# Altium PCB FrontPanel.PcbDoc
Units mm, origin at the board's own origin, x right, y up, seen from the top; angles counter-clockwise.
Board outline 35 x 35 mm, 2 copper layers (Top Layer, Bottom Layer); 33 components, 32 nets, 102 pads, 60 vias.
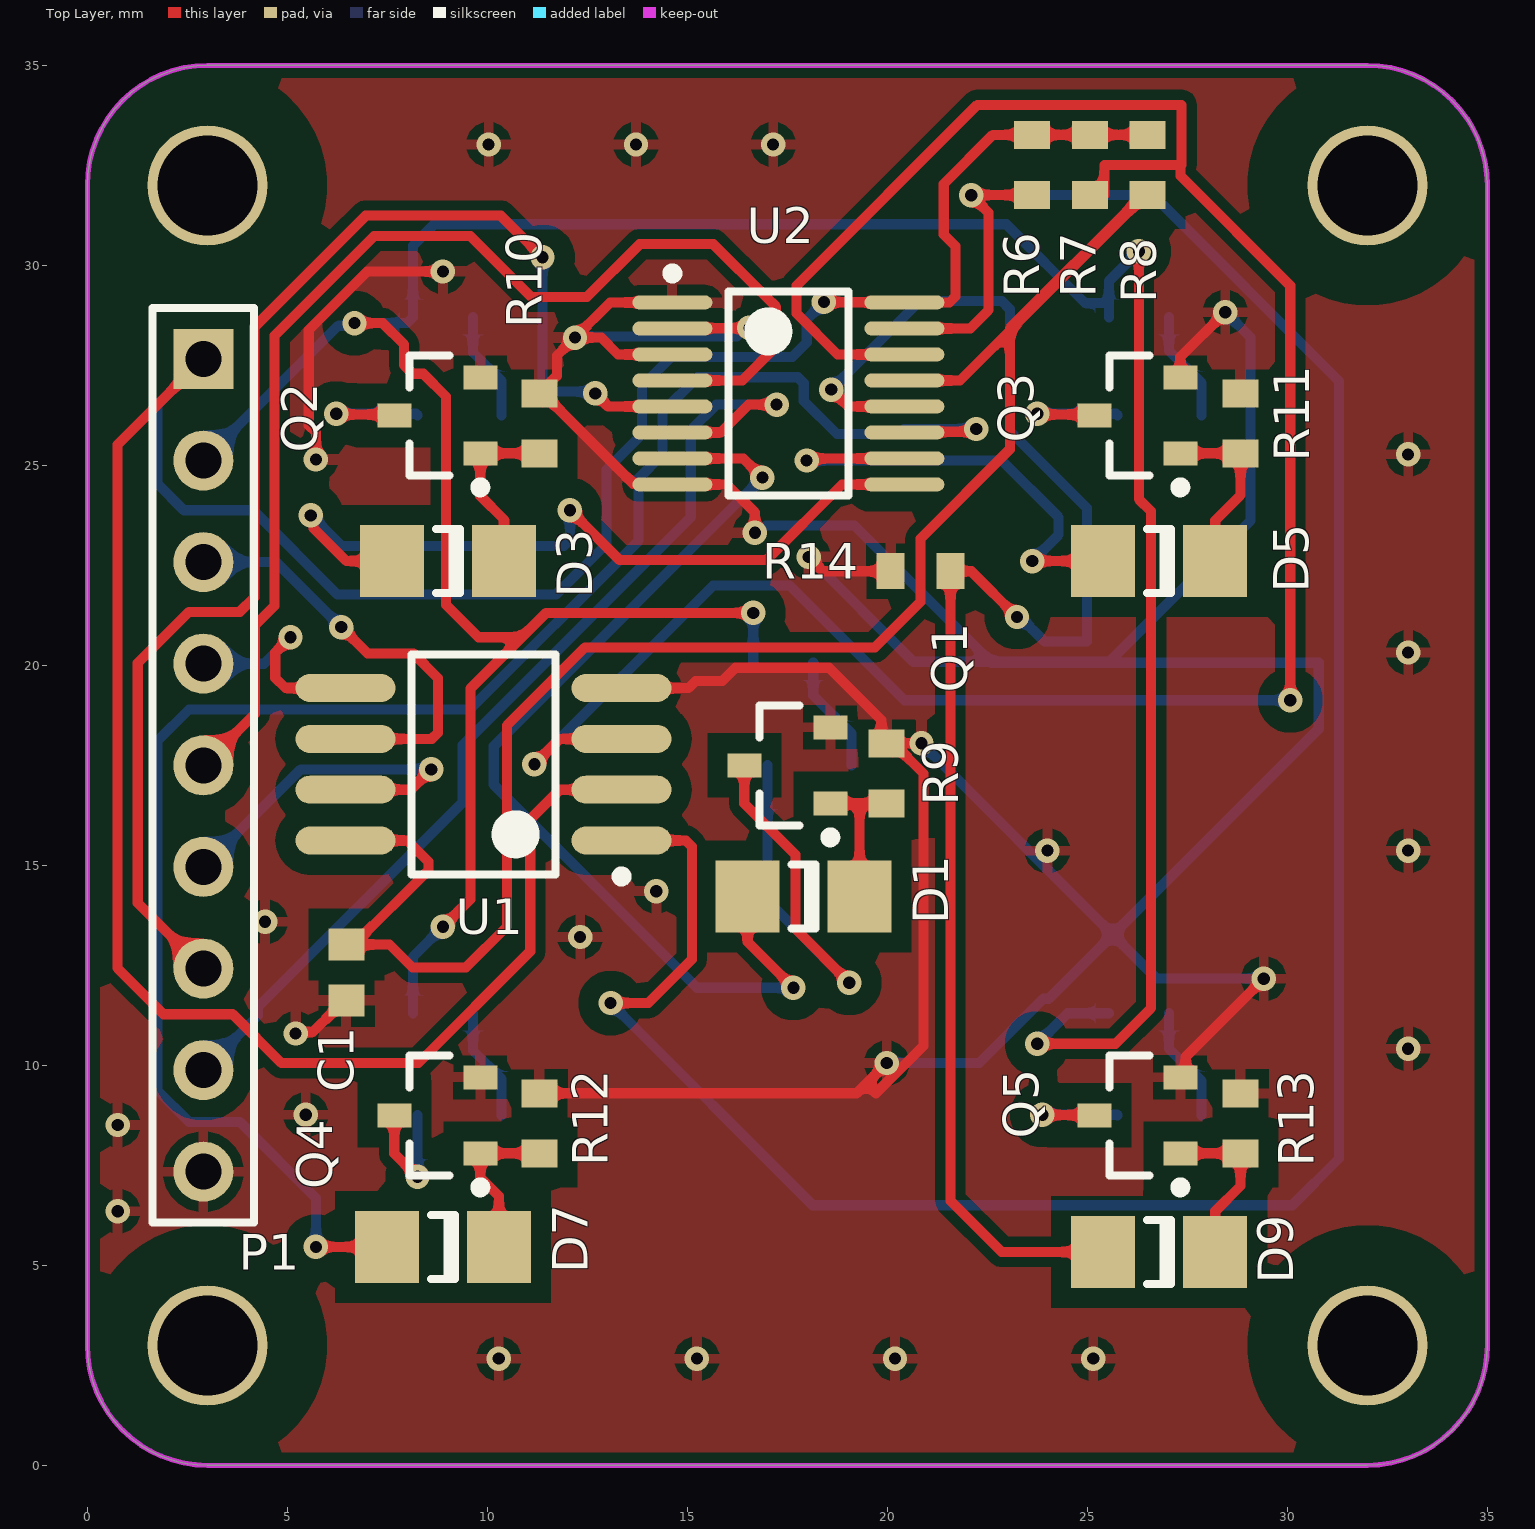
[diagram p0: Top Layer view]
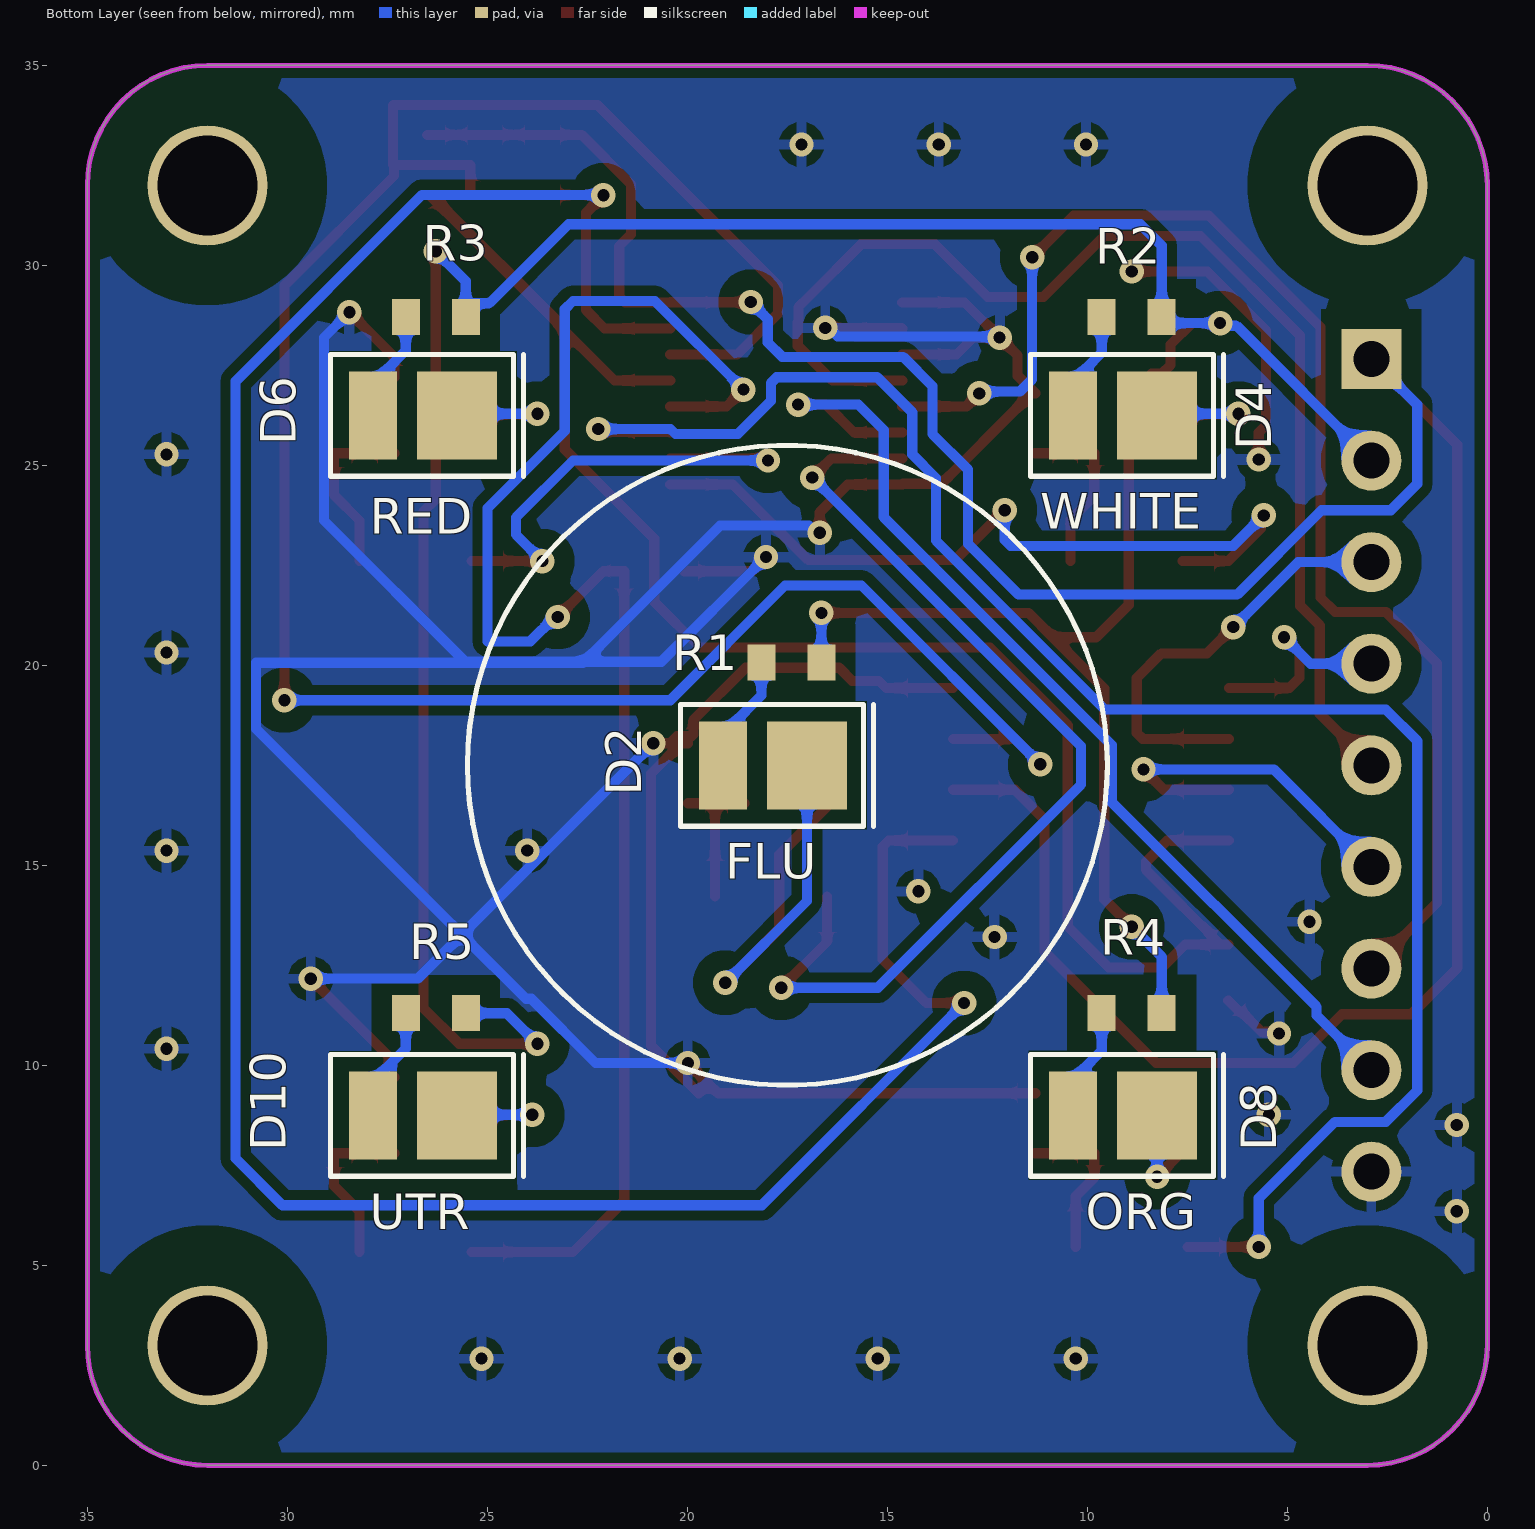
[diagram p1: Bottom Layer view, seen from below]

## Layer stack, top to bottom
Top Solder: solder mask 0.0102, Solder Resist, Dk 3.5
Top Layer: signal copper 0.0356
Dielectric 1: dielectric 0.32, FR-4, Dk 4.8
Bottom Layer: signal copper 0.0356
Bottom Solder: solder mask 0.0102, Solder Resist, Dk 3.5

## Board outline
3,0 cw(c3,3) 0,3 0,32 cw(c3,32) 3,35 32,35 cw(c32,32) 35,32 35,3 cw(c32,3) 32,0

## Design rules (kind name [scope] priority, off if disabled: settings)
Clearance [All] p1: gap=0.254 ignorepadtopadclearanceinfootprint=FALSE except(0.508: SMDPad-Poly THPad-Poly Via-Poly)
MinimumSolderMaskSliver MinimumSolderMaskSliver_1 [HasFootprint('TSOP65P640-16AM') vs HasFootprint('TSOP65P640-16AM')] p1: minsoldermaskwidth=0.09
MinimumSolderMaskSliver [All] p2: minsoldermaskwidth=0.254
PolygonConnect [All] p1: connectstyle=Relief reliefconductorwidth=0.254 reliefentries=4 polygonreliefangle="90 Angle" airgapwidth=0.254
RoutingVias [All] p1: holewidth=0.305 width=0.61 viastyle="Through Hole" minholewidth=0.305 minwidth=0.61 maxholewidth=0.305 maxwidth=0.61
SMDEntry SMDEntry_2 [HasFootprint('SOP127P780-8M')] p1: side=FALSE corner=FALSE anyangle=FALSE
SMDEntry SMDEntry_1 [HasFootprint('TSOP65P640-16AM')] p2: side=FALSE corner=FALSE anyangle=FALSE
SMDEntry [HasFootprint('SOP127P780-8M')] p3: side=FALSE corner=FALSE anyangle=FALSE
SMDToCorner [All] p1: distance=50000
SMDToPlane [All] p1: distance=50000
SilkToSolderMaskClearance SilkToSolderMaskClearance_1 [HasFootprint('CD3216-1206') vs HasFootprint('CD3216-1206')] p1: minsilkscreentomaskgap=0.2 clearancetoexposedcopper=TRUE
SilkToSolderMaskClearance [IsPad] p2: minsilkscreentomaskgap=0.254 clearancetoexposedcopper=TRUE
SolderMaskExpansion [All] p1: expansion=0.102 istentingtop=FALSE
SupplyNets "Schematic Supply Nets" [InNet('GND')] p1: voltage=0.000
Width [All] p1: maxlimit=0.254 minlimit=0.254 preferedwidth=0.254
28 further rules are at their usual default settings.

## Components (designator, comment, footprint, x,y, rotation, side; value= is the part's Value field where it differs from the comment)
C1 "" CAPC1608L 6.477,12.319 r270 top value=104
D1 "1N4148" CD3216-1206 17.907,14.224 r0 top
D2 "LED FLU" LEDCHIP2835 18.008,17.5 r180 bottom locked
D3 "1N4148" CD3216-1206 9.017,22.606 r0 top
D4 "LED WHITE" LEDCHIP2835 9.258,26.25 r180 bottom locked
D5 "1N4148" CD3216-1206 26.797,22.606 r0 top
D6 "LED RED" LEDCHIP2835 26.758,26.25 r180 bottom locked
D7 "1N4148" CD3216-1206 8.89,5.461 r0 top
D8 "LED ORG" LEDCHIP2835 9.258,8.75 r180 bottom locked
D9 "1N4148" CD3216-1206 26.797,5.334 r0 top
D10 "LED UTR" LEDCHIP2835 26.758,8.75 r180 bottom locked
P1 "Header 9" HDR1X9 2.9,27.66 r270 top locked
Q1 "AO3400,A09T" SOT-23B_L 17.5,17.5 r180 top
Q2 "AO3400,A09T" SOT-23B_L 8.75,26.25 r180 top
Q3 "AO3400,A09T" SOT-23B_L 26.25,26.25 r180 top
Q4 "AO3400,A09T" SOT-23B_L 8.75,8.75 r180 top
Q5 "AO3400,A09T" SOT-23B_L 26.25,8.75 r180 top
R1 "" RESC1608L 17.399,20.066 r0 bottom value=2R
R2 "" RESC1608L 8.89,28.702 r0 bottom value=5R1
R3 "" RESC1608L 26.289,28.702 r0 bottom value=15R
R4 "" RESC1608L 8.89,11.303 r0 bottom value=20R
R5 "" RESC1608L 26.289,11.303 r0 bottom value=2R
R6 "" RESC1608L 23.622,32.512 r270 top value=10K
R7 "" RESC1608L 25.061,32.512 r270 top value=10K
R8 "" RESC1608L 26.501,32.512 r270 top value=10K
R9 "" RESC1608L 19.981,17.3 r90 top value=10K
R10 "" RESC1608L 11.303,26.05 r90 top value=10K
R11 "" RESC1608L 28.829,26.05 r90 top value=10K
R12 "" RESC1608L 11.303,8.55 r90 top value=10K
R13 "" RESC1608L 28.829,8.55 r90 top value=10K
R14 "" RESC1608L 20.828,22.352 r180 top value=1M
U1 "STC8G1K17A" SOP127P780-8M 9.906,17.526 r180 top
U2 "TCA9534" TSOP65P640-16AM 17.526,26.797 r0 top

## Footprints (in the part's own frame and the unit in brackets; to place one, negate y for a bottom-side part, rotate by r counter-clockwise, add the part's x,y. Pads: shape width x height; smd on the part's side, far side on the other; paste and mask are expansions set on the pad)
CAPC1608L [mm] "Chip Capacitor, Body 1.6x0.8mm, IPC High Density"
  rect 0.8x0.9 smd: 1(-0.7,0) 2(0.7,0)
  body extent -0.87,-0.48 0.87,0.48, height 0.85
CD3216-1206 [mm] "Chip Diode; Body 3.2 x 1.6 mm (LxW typ)"
  rect 1.6x1.8 smd: 1(-1.4,0) 2(1.4,0)
  silkscreen extent -0.3,-0.8 0.3,0.8
HDR1X9 [mm] "Connector; Header; 9 Position"
  rect 1.5x1.5 hole 0.9: 1(0,0)
  round 1.5 hole 0.9: 2(2.54,0) 3(5.08,0) 4(7.62,0) 5(10.16,0) 6(12.7,0) 7(15.24,0) 8(17.78,0) 9(20.32,0)
  silkscreen extent -1.27,-1.27 21.59,1.27
LEDCHIP2835 [mm] "LEDCHIP2835"
  rect 1.2x2.2 smd: 1(-1.1,0)
  rect 2x2.2 smd: 2(1,0)
  silkscreen extent -2.16,-1.52 2.67,1.52, body extent -1.52,-1.4 1.78,1.4, height 0.7
RESC1608L [mm] "Chip Resistor, Body 1.6x0.8mm, IPC High Density"
  rect 0.7x0.9 smd: 1(-0.75,0) 2(0.75,0)
  body extent -0.85,-0.48 0.85,0.48, height 0.6
SOP127P780-8M [mm] "SOP, 8-Leads, Body 5.3x5.3mm, Pitch 1.27mm, IPC Low Density"
  oval 2.5x0.7 smd: 1(-3.45,1.905) 2(-3.45,0.635) 3(-3.45,-0.635) 4(-3.45,-1.905) 5(3.45,-1.905) 6(3.45,-0.635) 7(3.45,0.635) 8(3.45,1.905)
  silkscreen extent -3.57,-2.75 1.8,2.93, body extent -2.73,-2.75 2.73,2.75, height 2.03
SOT-23B_L [mm] "SOT23, 3-Leads, Body 2.9x1.3mm, Pitch 0.95mm, Lead Span 2.4mm, IPC High Density"
  rect 0.85x0.6 smd: 1(-1.075,0.95) 2(-1.075,-0.95) 3(1.075,0)
  silkscreen extent -1.2,-1.5 0.7,1.92, body extent -0.7,-1.5 0.7,1.5, height 1.14
TSOP65P640-16AM [mm] "TSOP, 16-Leads, Body 5x4.4mm, Pitch 0.65mm, IPC Low Density"
  oval 2x0.35 smd: 1(-2.9,2.275) 2(-2.9,1.625) 3(-2.9,0.975) 4(-2.9,0.325) 5(-2.9,-0.325) 6(-2.9,-0.975) 7(-2.9,-1.625) 8(-2.9,-2.275) 9(2.9,-2.275) 10(2.9,-1.625) 11(2.9,-0.975) 12(2.9,-0.325) 13(2.9,0.325) 14(2.9,0.975) 15(2.9,1.625) 16(2.9,2.275)
  silkscreen extent -3.02,-2.55 1.5,3.12, body extent -2.25,-2.55 2.25,2.55, height 1.1

## Part data
C1: library part Cap, "Capacitor", LatestRevisionDate=17-Jul-2002, LatestRevisionNote="Re-released for DXP Platform.", PackageDescription="Radial Cap, Thru-Hole; 2 Leads; 0.3 in Pin Spacing", PackageReference=RAD-0.3, Published=8-Jun-2000, Publisher="Altium Limited"
D1 D3 D5 D7 D9: library part Diode, "Default Diode", Code_JEDEC=DO-214-AB, LatestRevisionDate=17-Jul-2002, LatestRevisionNote="Re-released for DXP Platform.", PackageDescription="DO-214-AB/SMC; 2 C-Bend Leads; Body 7.9 x 5.9 mm, inc. leads (LxW)", PackageReference=SMC, PackageVersion=Sep-1996, Published=8-Jun-2000, Publisher="Altium Limited"
D2 D4 D6 D8 D10: library part LED0, "Typical INFRARED GaAs LED", LatestRevisionDate=08-Jul-2005, LatestRevisionNote="Mech Layer 1 removed.", PackageDescription="LED; 2 Leads", PackageReference=LED-0, Published=8-Jun-2000, Publisher="Altium Limited"
P1: "Header, 9-Pin", LatestRevisionDate=17-Jul-2002, LatestRevisionNote="Re-released for DXP Platform.", Publisher="Altium Limited"
Q1 Q2 Q3 Q4 Q5: library part NMOS-2, "N-Channel Power MOSFET", ComponentLink1Description="Manufacturer Link", ComponentLink1URL=http://www.irf.com/, DatasheetVersion=PD-9.814, LatestRevisionDate=17-Jul-2002, LatestRevisionNote="Re-released for DXP Platform.", Note="Pin 2 is electrically connected to pin 4.", PackageDescription="TO, Thru-Hole, Vertical, Heatsink Mounted; 3 In-Line Leads; Pitch 2.54 mm", PackageReference=TO-220AB, PackageVersion=Feb-1997, Published=8-Jun-2000, Publisher="Altium Limited"
R1 R2 R3 R4 R5 R6 R7 R8 R9 R10 R11 R12 R13 R14: library part Res1, "Resistor", LatestRevisionDate=17-Jul-2002, LatestRevisionNote="Re-released for DXP Platform.", PackageDescription="Axial Device, Thru-Hole; 2 Leads; 0.3 in Pin Spacing", PackageReference=AXIAL-0.3, Published=8-Jun-2000, Publisher="Altium Limited"

## Free pads (board coordinates)
  round 3 hole 2.5: 0(3,3) 0(3,32) 0(32,3) 0(32,32)

## Via types
v1: diameter 0.61, hole 0.305, Top Layer to Bottom Layer, 60 vias

## Nets (pads, with @x,y where several pads share a name; then routed paths per layer and width w, separated by ;. In a path a pad name is that pad's centre, name@x,y a point inside that pad or via, vN(x,y) a via of type N, cw(c..) or ccw(c..) an arc to the next point about the centre after c; other vN are vias at no path point)
ADP_ON: P1.8 U2.6 | length 26.4
  Top Layer w0.254: U2.6 15.834,25.822 16.529,26.517 v1(17.232,26.517)
  Bottom Layer w0.254: P1.8 4.267,11.247 4.267,11.46 9.388,16.581 9.388,18.005 15.088,23.705 15.088,25.883 15.722,26.517 v1(17.232,26.517)
GND: C1.2 P1.9 Q1.2 Q2.2 Q3.2 Q4.2 Q5.2 R9.2 R10.2 R11.2 R12.2 R13.2 R14.2 U1.4 U2.1 U2.2 U2.3 U2.8 | length 126.7
  Top Layer w0.254: v1(5.207,10.795) 5.243,10.831 5.639,10.831 6.154,11.346 6.204,11.346 C1.2 ; v1(5.715,25.146) 5.715,25.819 5.537,25.997 5.537,28.382 7,29.845 v1(8.89,29.845) ; R12.2 19.228,9.3 19.471,9.543 ; R10.2 11.743,27.24 11.743,27.745 v1(12.192,28.194) ; R10.2@11.475,26.711 11.492,26.711 11.626,26.577 11.626,26.561 13.646,24.54 14.608,24.54 U2.8 15.991,24.522 16.689,23.824 v1(16.689,23.316) ; U1.4 15.032,19.431 15.21,19.609 15.875,19.609 16.205,19.939 18.542,19.939 19.849,18.632 19.849,18.273 19.897,18.225 20.256,18.225 R9.2@20.431,18.05 ; U2.3 13.269,27.772 12.847,28.194 v1(12.192,28.194) ; U2.2 14.632,28.428 16.546,28.428 v1(16.552,28.435) ; U2.1 13.07,29.072 v1(12.192,28.194) ; v1(18.034,22.708) 18.39,22.352 R14.2 ; R9.2 R9.2@20.152,18.05 ; v1(19.986,10.058) 19.471,9.543 ; v1(20.853,18.05) R9.2@20.431,18.05 ; Q5.2 27.457,9.7 27.457,10.211 v1(29.413,12.167) ; Q3.2 27.325,27.706 v1(28.448,28.829) ; 19.471,9.543 19.714,9.3 20.904,10.49 20.904,17.297 R9.2@20.152,18.05 ; R9.2@20.152,18.05 R9.2@20.431,18.05
  Bottom Layer w0.254: v1(12.192,28.194) 12.217,28.219 16.24,28.219 16.456,28.435 v1(16.552,28.435) ; v1(16.689,23.316) 16.785,23.316 16.964,23.495 19.177,23.495 22.606,20.066 30.785,20.066 30.785,18.415 25.637,13.267 ; v1(18.034,22.708) 20.651,20.091 25.552,20.091 29.083,23.622 29.083,28.194 v1(28.448,28.829) ; v1(19.986,10.058) 22.296,10.058 23.9,11.663 24.032,11.663 25.637,13.267 ; v1(20.853,18.05) 25.637,13.267 ; v1(29.413,12.167) 26.737,12.167 25.637,13.267
  other v1: 10.287,2.667 15.24,2.667 20.193,2.667 25.146,2.667 0.762,6.35 0.762,8.509 5.461,8.763 33.02,10.414 12.319,13.208 4.445,13.589 14.224,14.351 24.003,15.367 33.02,15.367 33.02,20.32 33.02,25.273 10.033,33.02 13.716,33.02 17.145,33.02
INT: C1.1 R8.2 U1.8 U2.13 | length 46.9
  Top Layer w0.254: U1.8 8.001,15.621 8.531,15.091 8.531,14.881 C1.1@6.669,13.019 ; C1.1 C1.1@6.669,13.019 ; U2.13 21.819,27.122 R8.2@26.365,31.669 ; R8.2 26.459,31.762 R8.2@26.365,31.669 ; C1.1@6.669,13.019 7.555,13.019 8.128,12.446 9.464,12.446 10.49,13.472 10.49,18.499 12.438,20.447 19.685,20.447 20.828,21.59 20.828,23.165 23.063,25.4 23.063,28.424 26.307,31.669 R8.2@26.365,31.669
KEY_PRESS: P1.5 U2.4 | length 30.8
  Top Layer w0.254: P1.5 4.191,18.791 4.191,20.999 4.679,21.487 4.679,28.243 7.17,30.734 9.576,30.734 11.1,29.21 12.49,29.21 13.81,30.531 15.651,30.531 16.972,29.21 17.221,28.961 17.221,28.588 17.238,28.571 17.238,27.988 16.373,27.122 U2.4
LED_FLU: D1.1 U2.7 | length 25.3
  Top Layer w0.254: U2.7 16.399,25.172 v1(16.877,24.694) ; D1.1 16.507,13.084 v1(17.653,11.938)
  Bottom Layer w0.254: v1(16.877,24.694) 10.16,17.977 10.16,17.018 15.24,11.938 v1(17.653,11.938)
LED_ORG: D7.1 U2.11 | length 45.3
  Top Layer w0.254: v1(5.715,5.461) D7.1 ; U2.11 20.444,25.84 22.157,25.84 v1(22.225,25.908)
  Bottom Layer w0.254: v1(5.715,5.461) 5.715,6.68 3.81,8.585 2.54,8.585 1.753,9.373 1.753,18.11 2.54,18.898 9.562,18.898 13.782,23.117 13.782,24.678 14.377,25.273 14.377,26.325 15.255,27.203 17.763,27.203 17.911,27.054 17.911,26.61 18.74,25.781 20.297,25.781 20.424,25.908 v1(22.225,25.908)
LED_RED: D5.1 U2.10 | length 12.5
  Top Layer w0.254: v1(17.983,25.121) 18.035,25.172 U2.10 ; v1(23.622,22.606) D5.1
  Bottom Layer w0.254: v1(17.983,25.121) 22.86,25.121 24.282,23.698 24.282,23.266 v1(23.622,22.606)
LED_UTR: D9.1 R14.1 U2.12 | length 40.8
  Top Layer w0.254: v1(18.597,26.894) 19.019,26.472 U2.12 ; v1(23.241,21.209) 22.098,22.352 R14.1 21.578,6.616 22.86,5.334 D9.1
  Bottom Layer w0.254: v1(18.597,26.894) 20.812,29.108 22.86,29.108 23.063,28.905 23.063,25.857 24.994,23.927 24.994,20.599 23.927,20.599 23.317,21.209 v1(23.241,21.209)
LED_WHITE: D3.1 U2.9 | length 19.9
  Top Layer w0.254: v1(5.588,23.749) 5.656,23.681 5.656,23.427 6.477,22.606 D3.1 ; v1(12.065,23.876) 13.311,22.63 16.973,22.63 18.865,24.522 U2.9
  Bottom Layer w0.254: v1(5.588,23.749) 6.35,22.987 11.916,22.987 12.065,23.136 v1(12.065,23.876)
NetD1_2: D1.2 Q1.1 R9.1 | length 3.7
  Top Layer w0.254: Q1.1 19.307,16.55 ; D1.2 19.307,16.55 ; R9.1 19.307,16.55
NetD2_1: D2.1 R1.2 | length 3
  Bottom Layer w0.254: R1.2 18.149,19.247 19.108,18.288 D2.1
NetD2_2: D2.2 Q1.3 | length 12.8
  Top Layer w0.254: Q1.3 16.425,16.545 17.703,15.266 17.703,13.412 v1(19.05,12.065)
  Bottom Layer w0.254: D2.2 17.008,14.107 v1(19.05,12.065)
NetD3_2: D3.2 Q2.1 R10.1 | length 4.4
  Top Layer w0.254: D3.2 10.417,23.647 9.825,24.239 Q2.1 R10.1
NetD4_1: D4.1 R2.2 | length 2.7
  Bottom Layer w0.254: R2.2 9.64,27.82 10.358,27.102 D4.1
NetD4_2: D4.2 Q2.3 | length 3.5
  Top Layer w0.254: v1(6.223,26.289) 6.243,26.269 7.656,26.269 Q2.3
  Bottom Layer w0.254: v1(6.223,26.289) 8.219,26.289 D4.2
NetD5_2: D5.2 Q3.1 R11.1 | length 4.5
  Top Layer w0.254: Q3.1 R11.1 28.829,24.254 28.197,23.622 D5.2
NetD6_1: D6.1 R3.2 | length 2.8
  Bottom Layer w0.254: R3.2 27.039,27.87 27.858,27.051 D6.1
NetD6_2: D6.2 Q3.3 | length 3.5
  Top Layer w0.254: v1(23.749,26.289) 23.769,26.269 25.155,26.269 Q3.3
  Bottom Layer w0.254: v1(23.749,26.289) 25.719,26.289 D6.2
NetD7_2: D7.2 Q4.1 R12.1 | length 4
  Top Layer w0.254: D7.2 10.29,6.728 9.825,7.193 Q4.1 R12.1
NetD8_1: D8.1 R4.2 | length 2.9
  Bottom Layer w0.254: R4.2 9.64,10.37 10.358,9.652 D8.1
NetD8_2: D8.2 Q4.3 | length 3.3
  Top Layer w0.254: Q4.3 7.675,7.794 v1(8.255,7.214)
  Bottom Layer w0.254: v1(8.255,7.214) 8.258,7.217 D8.2
NetD9_2: D9.2 Q5.1 R13.1 | length 4.2
  Top Layer w0.254: Q5.1 R13.1 28.829,6.985 28.197,6.353 D9.2
NetD10_1: D10.1 R5.2 | length 2.9
  Bottom Layer w0.254: R5.2 27.039,10.42 27.858,9.601 D10.1
NetD10_2: D10.2 Q5.3 | length 3.2
  Top Layer w0.254: v1(23.876,8.763) 23.883,8.756 25.169,8.756 Q5.3
  Bottom Layer w0.254: v1(23.876,8.763) 25.745,8.763 D10.2
POWER_EN: P1.6 U1.7 | length 9.1
  Top Layer w0.254: U1.7 8.088,16.891 v1(8.596,17.399)
  Bottom Layer w0.254: P1.6 5.339,17.399 v1(8.596,17.399)
RXD: P1.4 U1.5 | length 5.5
  Top Layer w0.254: v1(5.08,20.701) 4.699,20.32 4.699,19.685 4.953,19.431 U1.5
  Bottom Layer w0.254: P1.4 4.419,20.04 v1(5.08,20.701)
SCL: R7.2 U1.3 U2.14 | length 58.7
  Top Layer w0.254: v1(11.176,17.526) 11.811,18.161 U1.3 ; U2.14 18.756,27.772 17.729,28.799 17.729,29.489 22.25,34.011 27.356,34.011 27.356,32.512 27.051,32.512 25.425,32.512 25.425,31.762 R7.2 ; 27.332,32.485 27.332,32.231 30.074,29.489 v1(30.074,19.126)
  Bottom Layer w0.254: v1(11.176,17.526) 15.647,21.997 17.557,21.997 20.428,19.126 v1(30.074,19.126)
SDA: R6.2 U1.1 U2.15 | length 65.4
  Top Layer w0.254: v1(13.081,11.557) 14.024,11.557 15.113,12.646 15.113,15.472 14.964,15.621 U1.1 ; U2.15 22.073,28.422 22.53,28.879 22.53,31.318 v1(22.098,31.75) 22.104,31.756 23.616,31.756 R6.2
  Bottom Layer w0.254: v1(13.081,11.557) 18.136,6.502 30.124,6.502 31.293,7.671 31.293,27.102 26.633,31.762 22.11,31.762 v1(22.098,31.75)
TXD: P1.3 U1.6 | length 10.8
  Top Layer w0.254: v1(6.35,20.955) 7.006,20.299 8.149,20.299 8.763,19.685 8.763,18.31 8.614,18.161 U1.6
  Bottom Layer w0.254: P1.3 4.725,22.58 v1(6.35,20.955)
VCC: P1.1 R6.1 R7.1 R8.1 U1.2 U2.16 | length 72.9
  Top Layer w0.254: P1.1 0.753,25.513 0.753,12.43 1.905,11.278 3.632,11.278 4.851,10.058 8.28,10.058 11.074,12.852 11.074,16.154 11.811,16.891 U1.2 ; v1(18.415,29.083) 18.42,29.078 20.421,29.078 U2.16 21.553,29.072 21.702,29.221 21.702,30.483 21.412,30.772 21.412,32.034 22.64,33.262 R6.1 R7.1 R8.1
  Bottom Layer w0.254: P1.1 1.753,26.513 1.753,24.536 2.413,23.876 4.147,23.876 6.256,21.768 11.714,21.768 12.979,23.033 12.979,24.892 13.869,25.781 13.869,26.975 14.605,27.711 17.628,27.711 17.987,28.071 17.987,28.655 v1(18.415,29.083)
VLED: P1.2 R1.1 R2.1 R3.1 R4.1 R5.1 | length 81.9
  Top Layer w0.254: v1(6.68,28.555) 7.386,28.555 7.92,28.021 7.92,27.505 8.136,27.29 8.397,27.29 8.966,26.721 8.966,21.514 9.779,20.701 10.861,20.701 ; v1(8.89,13.462) 9.576,14.148 9.576,19.416 10.861,20.701 ; v1(16.649,21.311) 11.471,21.311 10.861,20.701 ; v1(23.749,10.541) 25.705,10.541 26.594,11.43 26.594,23.851 26.289,24.155 v1(26.289,30.353)
  Bottom Layer w0.254: P1.2 6.267,28.487 6.612,28.487 v1(6.68,28.555) 7.993,28.555 R2.1 8.14,30.492 8.676,31.028 22.972,31.028 24.943,29.058 R3.1@25.539,29.058 ; R4.1 8.14,12.712 v1(8.89,13.462) ; R1.1 v1(16.649,21.311) ; v1(23.749,10.541) 24.511,11.303 R5.1 ; R3.1 R3.1@25.539,29.058 ; v1(26.289,30.353) 25.539,29.603 R3.1@25.539,29.058
VLED_EN: P1.7 U2.5 | length 34
  Top Layer w0.254: P1.7 1.261,14.059 1.261,20.057 2.54,21.336 3.81,21.336 4.171,21.697 4.171,28.453 6.96,31.242 10.338,31.242 v1(11.379,30.201) ; v1(12.7,26.797) 13.025,26.472 U2.5
  Bottom Layer w0.254: v1(11.379,30.201) 11.379,27.153 11.688,26.843 12.654,26.843 v1(12.7,26.797)

## Polygon pours and split planes (outlines as drawn)
GND on Top Layer "GND_L01_P000" (solid, remove dead copper, pour order 0): 0,0 0,35 35,35 35,35.052 35,0.052 35,0
GND on Bottom Layer "GND_L02_P001" (solid, remove dead copper, pour order 1): 0,0 0,35 35,35 35,35.052 35,0.052 35,0

## Keep-outs
Keep-Out Layer:
  the board outline again, w0.127

## Other copper
Multi-Layer:
  pour cut-out: 3,0 cw(c3,3) 0,3 cw(c3,3) 3,6 cw(c3,3) 6,3 cw(c3,3)
  pour cut-out: 29,3 ccw(c32,3) 32,0 ccw(c32,3) 35,3 ccw(c32,3) 32,6 ccw(c32,3)
  pour cut-out: 32,29 cw(c32,32) 29,32 cw(c32,32) 32,35 cw(c32,32) 35,32 cw(c32,32)
  pour cut-out: 3,29 cw(c3,32) 0,32 cw(c3,32) 3,35 cw(c3,32) 6,32 cw(c3,32)

## Silkscreen, mask and mechanical layers (free items; w line width, h text height)
Bottom Overlay:
  circle w0.127: c17.5,17.5 r8
  text "WHITE" at 11.176,23.114 h1.52
  text "RED" at 27.94,22.987 h1.52
  text "FLU" at 19.05,14.367 h1.52
  text "ORG" at 10.033,5.604 h1.52
  text "UTR" at 27.94,5.604 h1.52
Bottom Solder:
  text "FireFly1.2 sTeeLM" at 24.13,4.572 h1.52
Mechanical 13:
  circle w0.127: c8.75,26.25 r4
  circle w0.127: c26.25,26.25 r4
  circle w0.127: c26.25,8.75 r4
  circle w0.127: c8.75,8.75 r4
Mechanical 15:
  circle w0.127: c32,3 r3
  circle w0.127: c32,32 r3
  circle w0.127: c3,32 r3
  circle w0.127: c3,3 r3